# EAGLE board lcd2 (EAGLE 4.09)
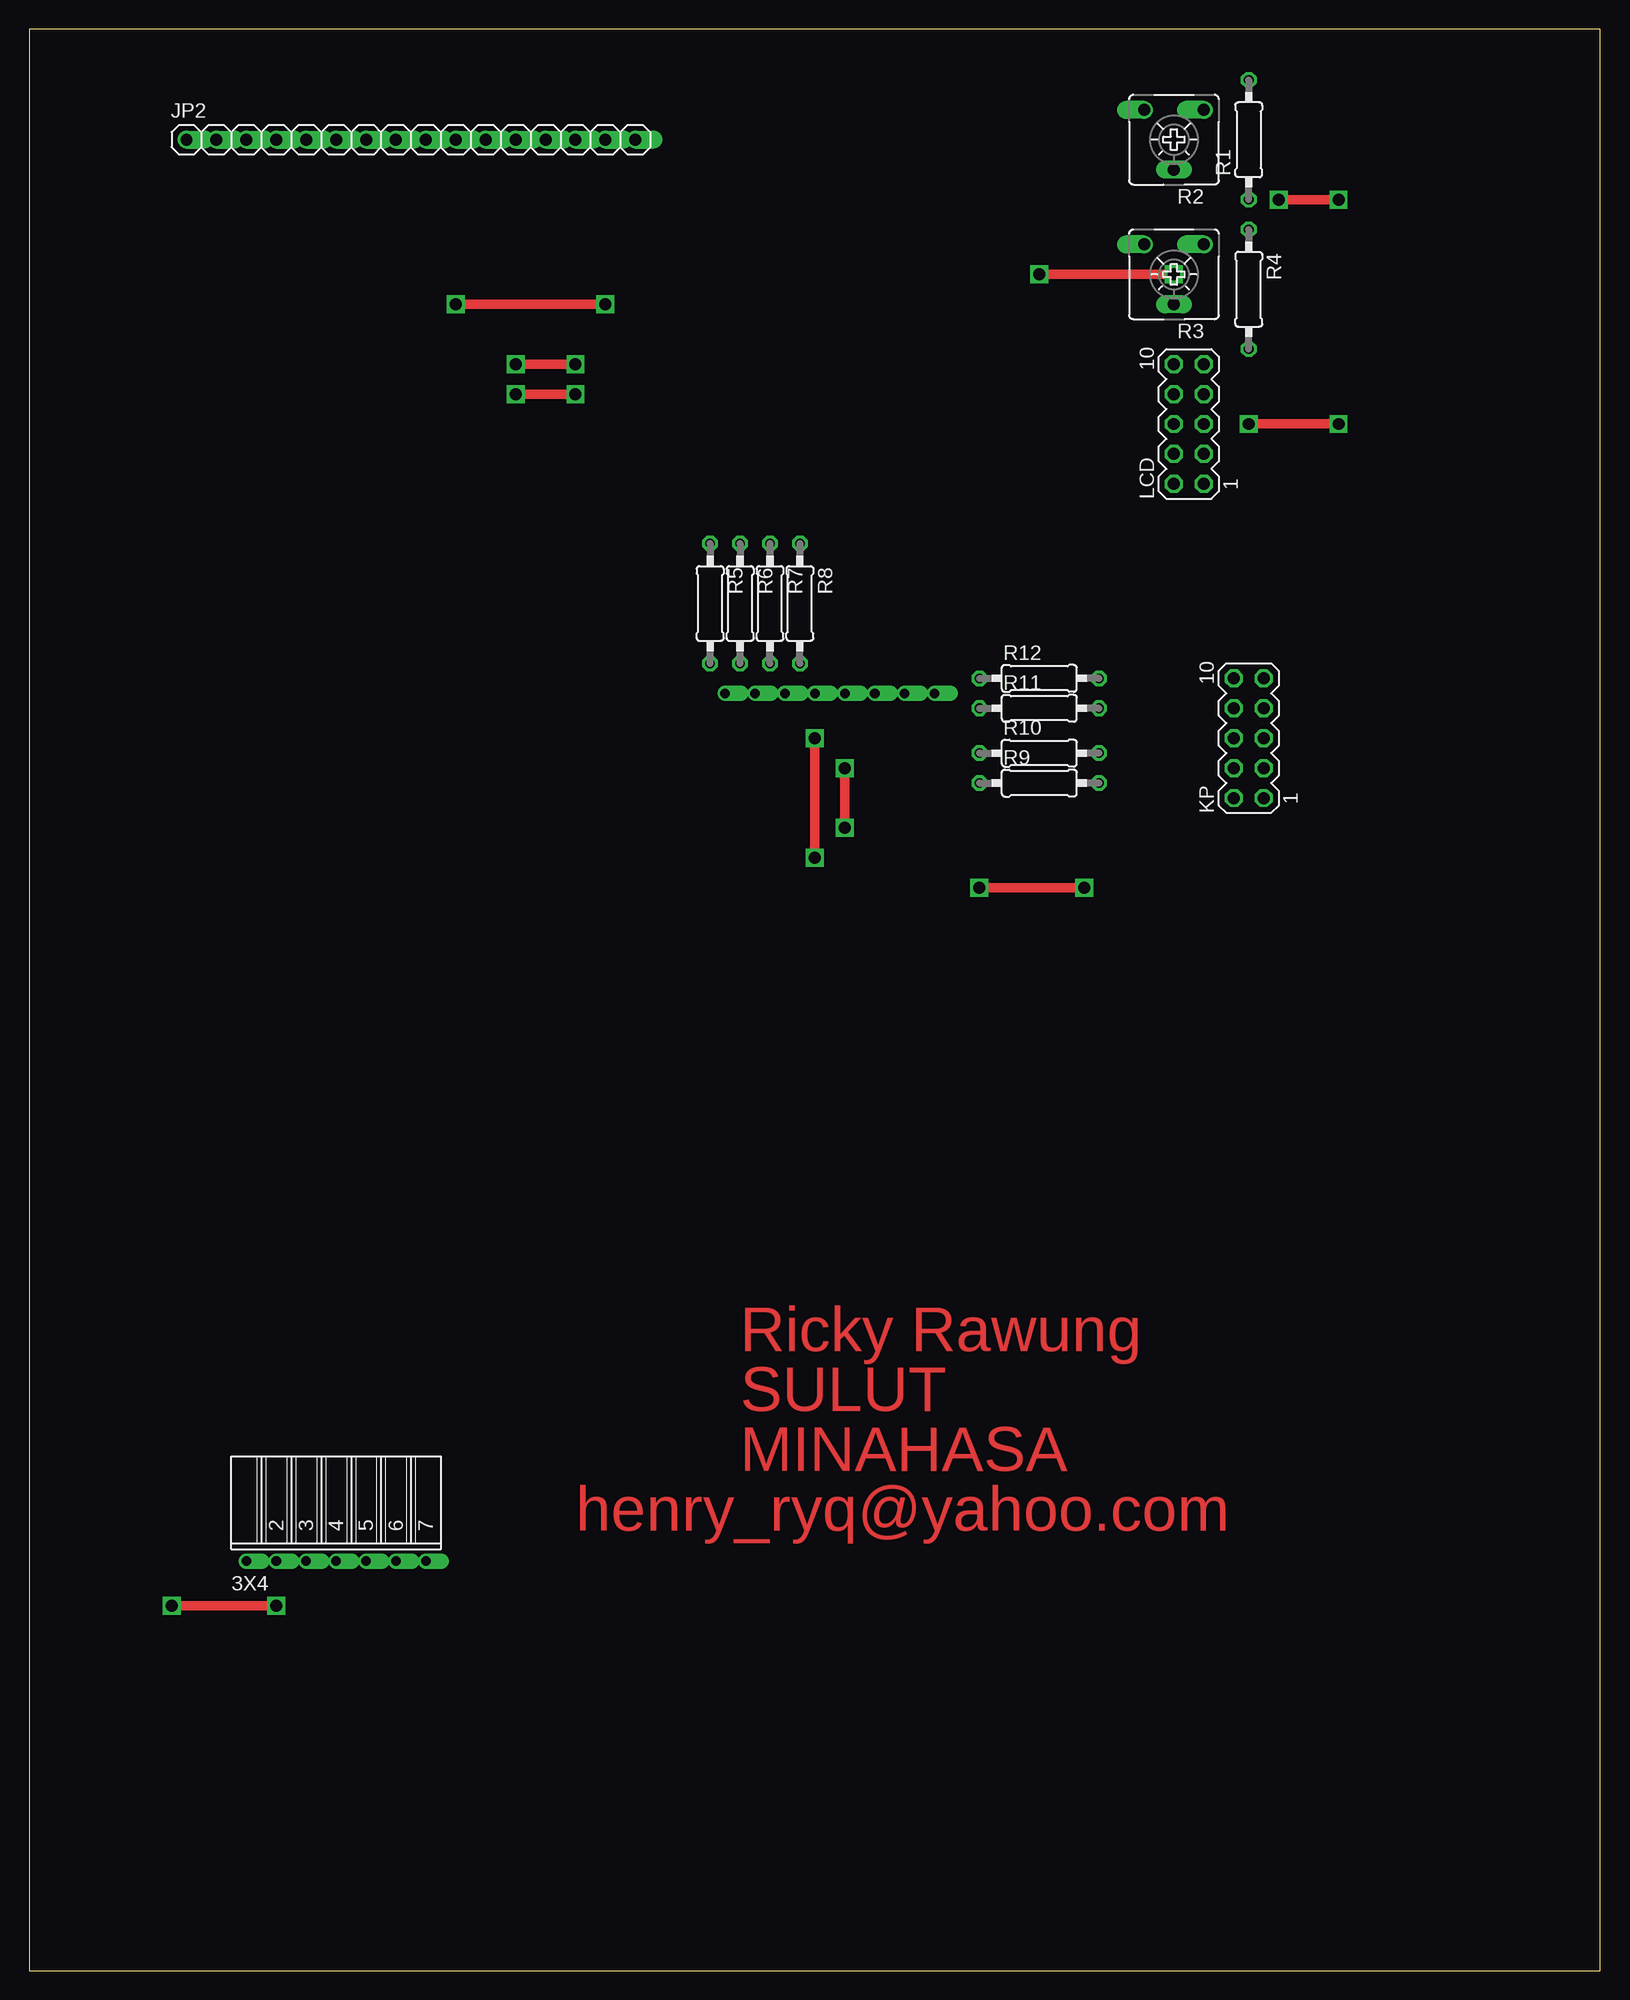
[diagram p0: board, top side]
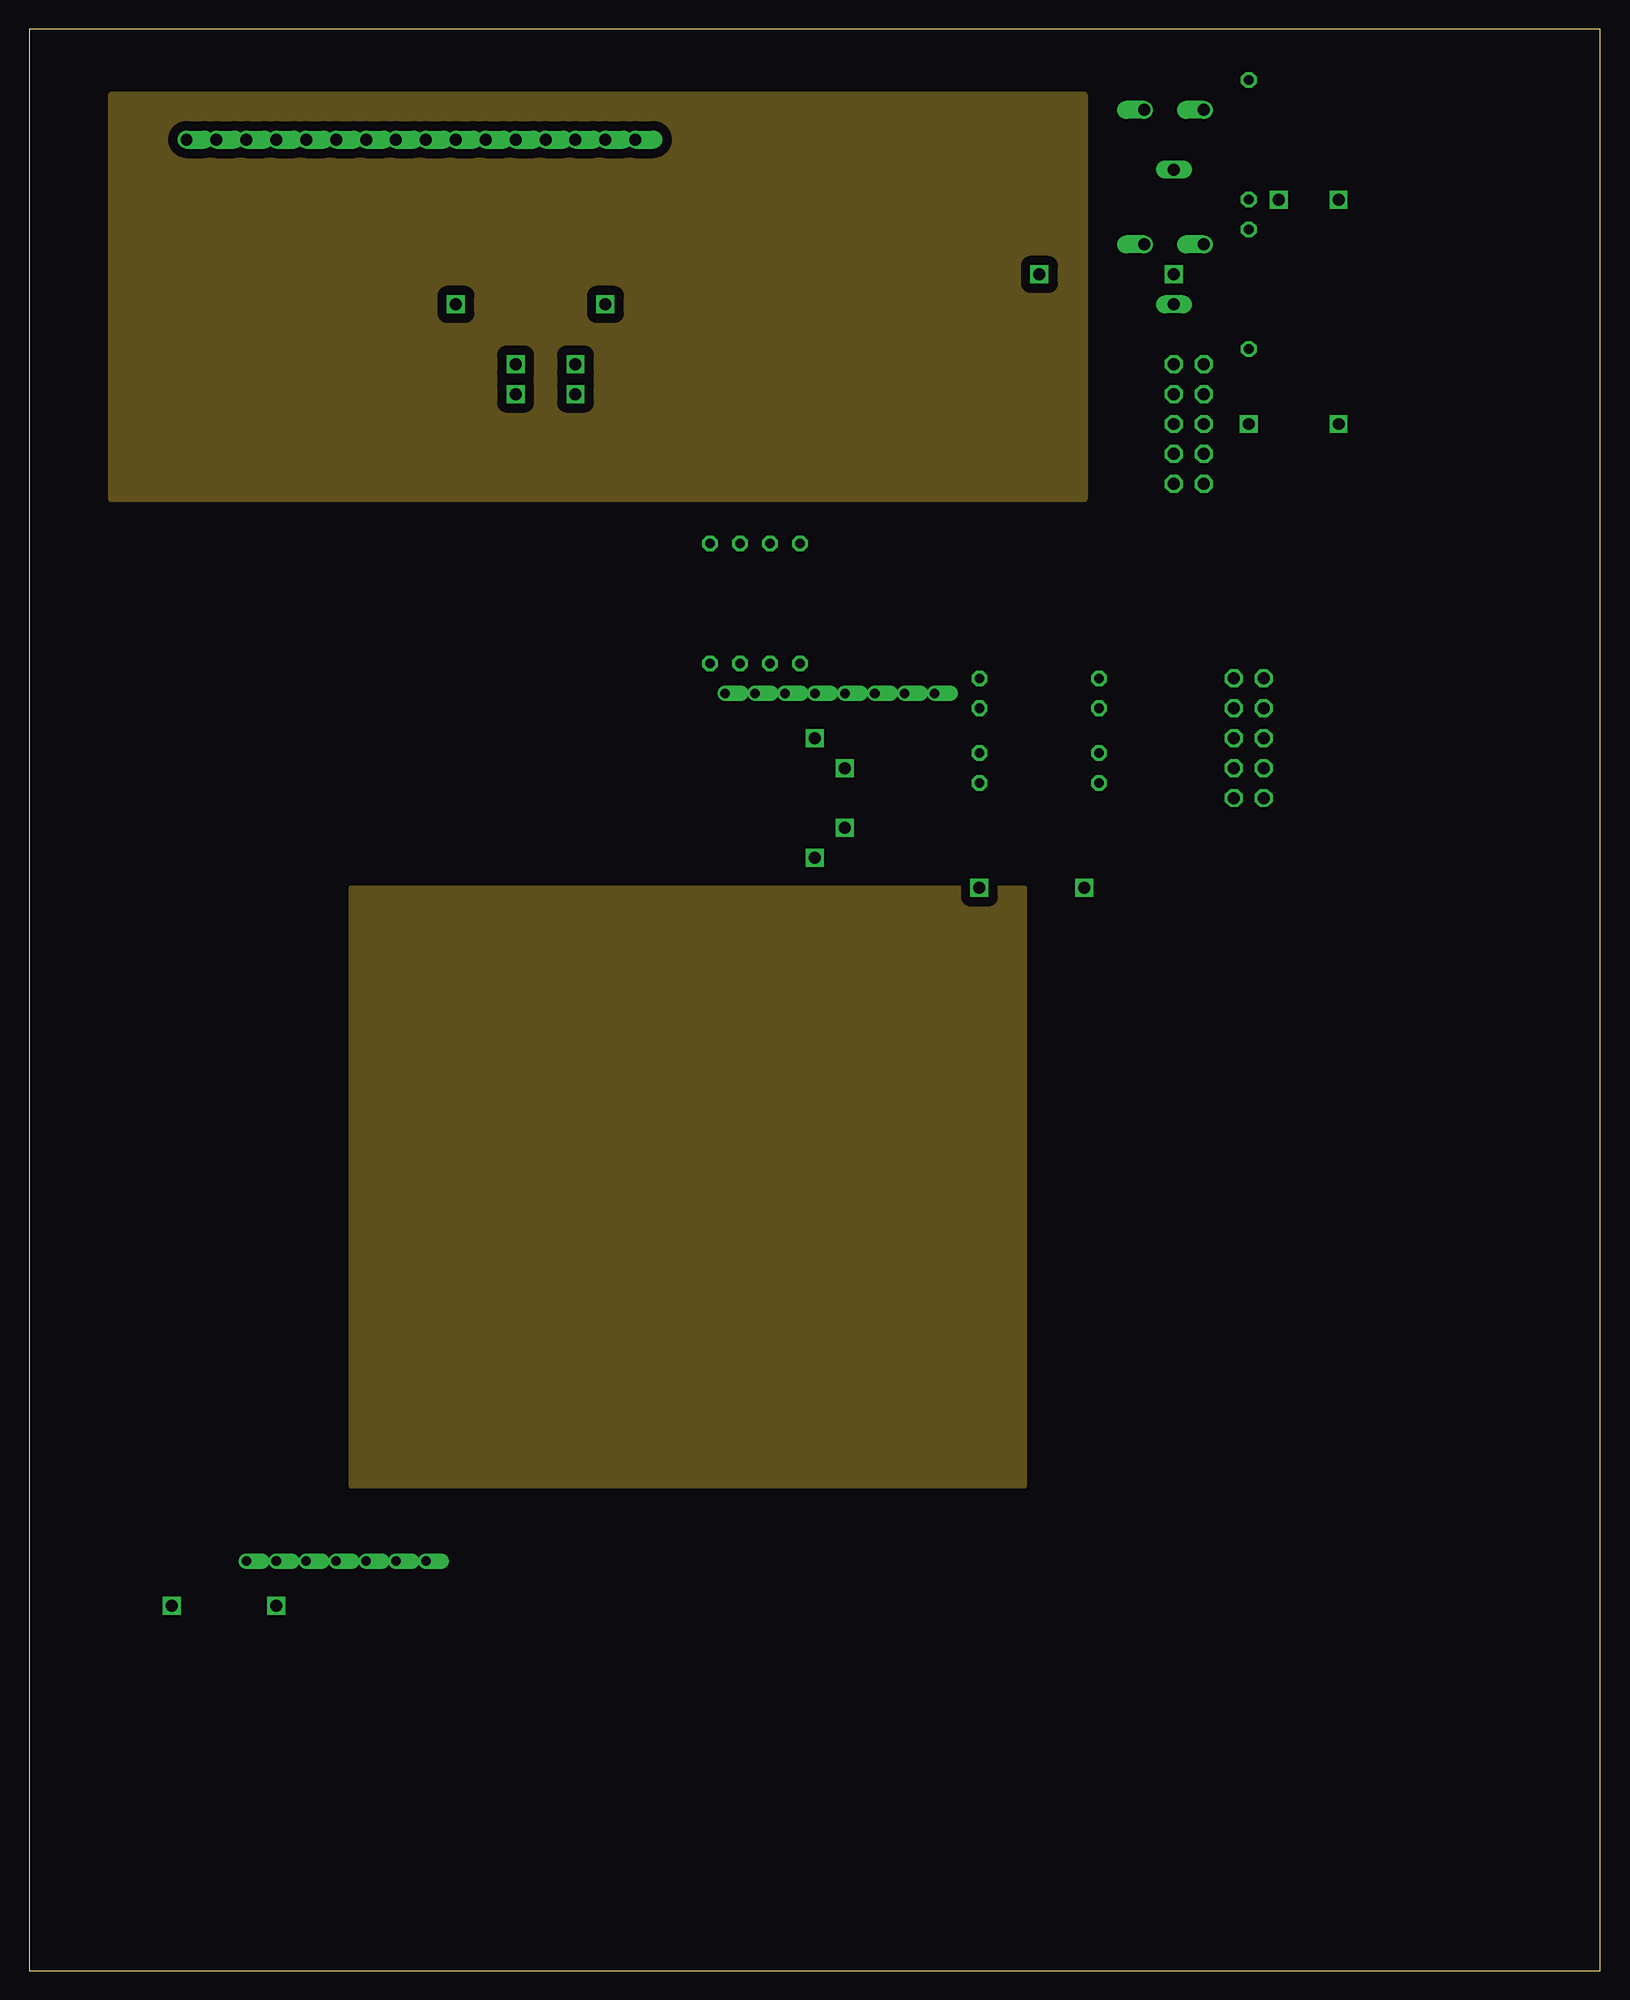
[diagram p1: board, inner layer Route15]
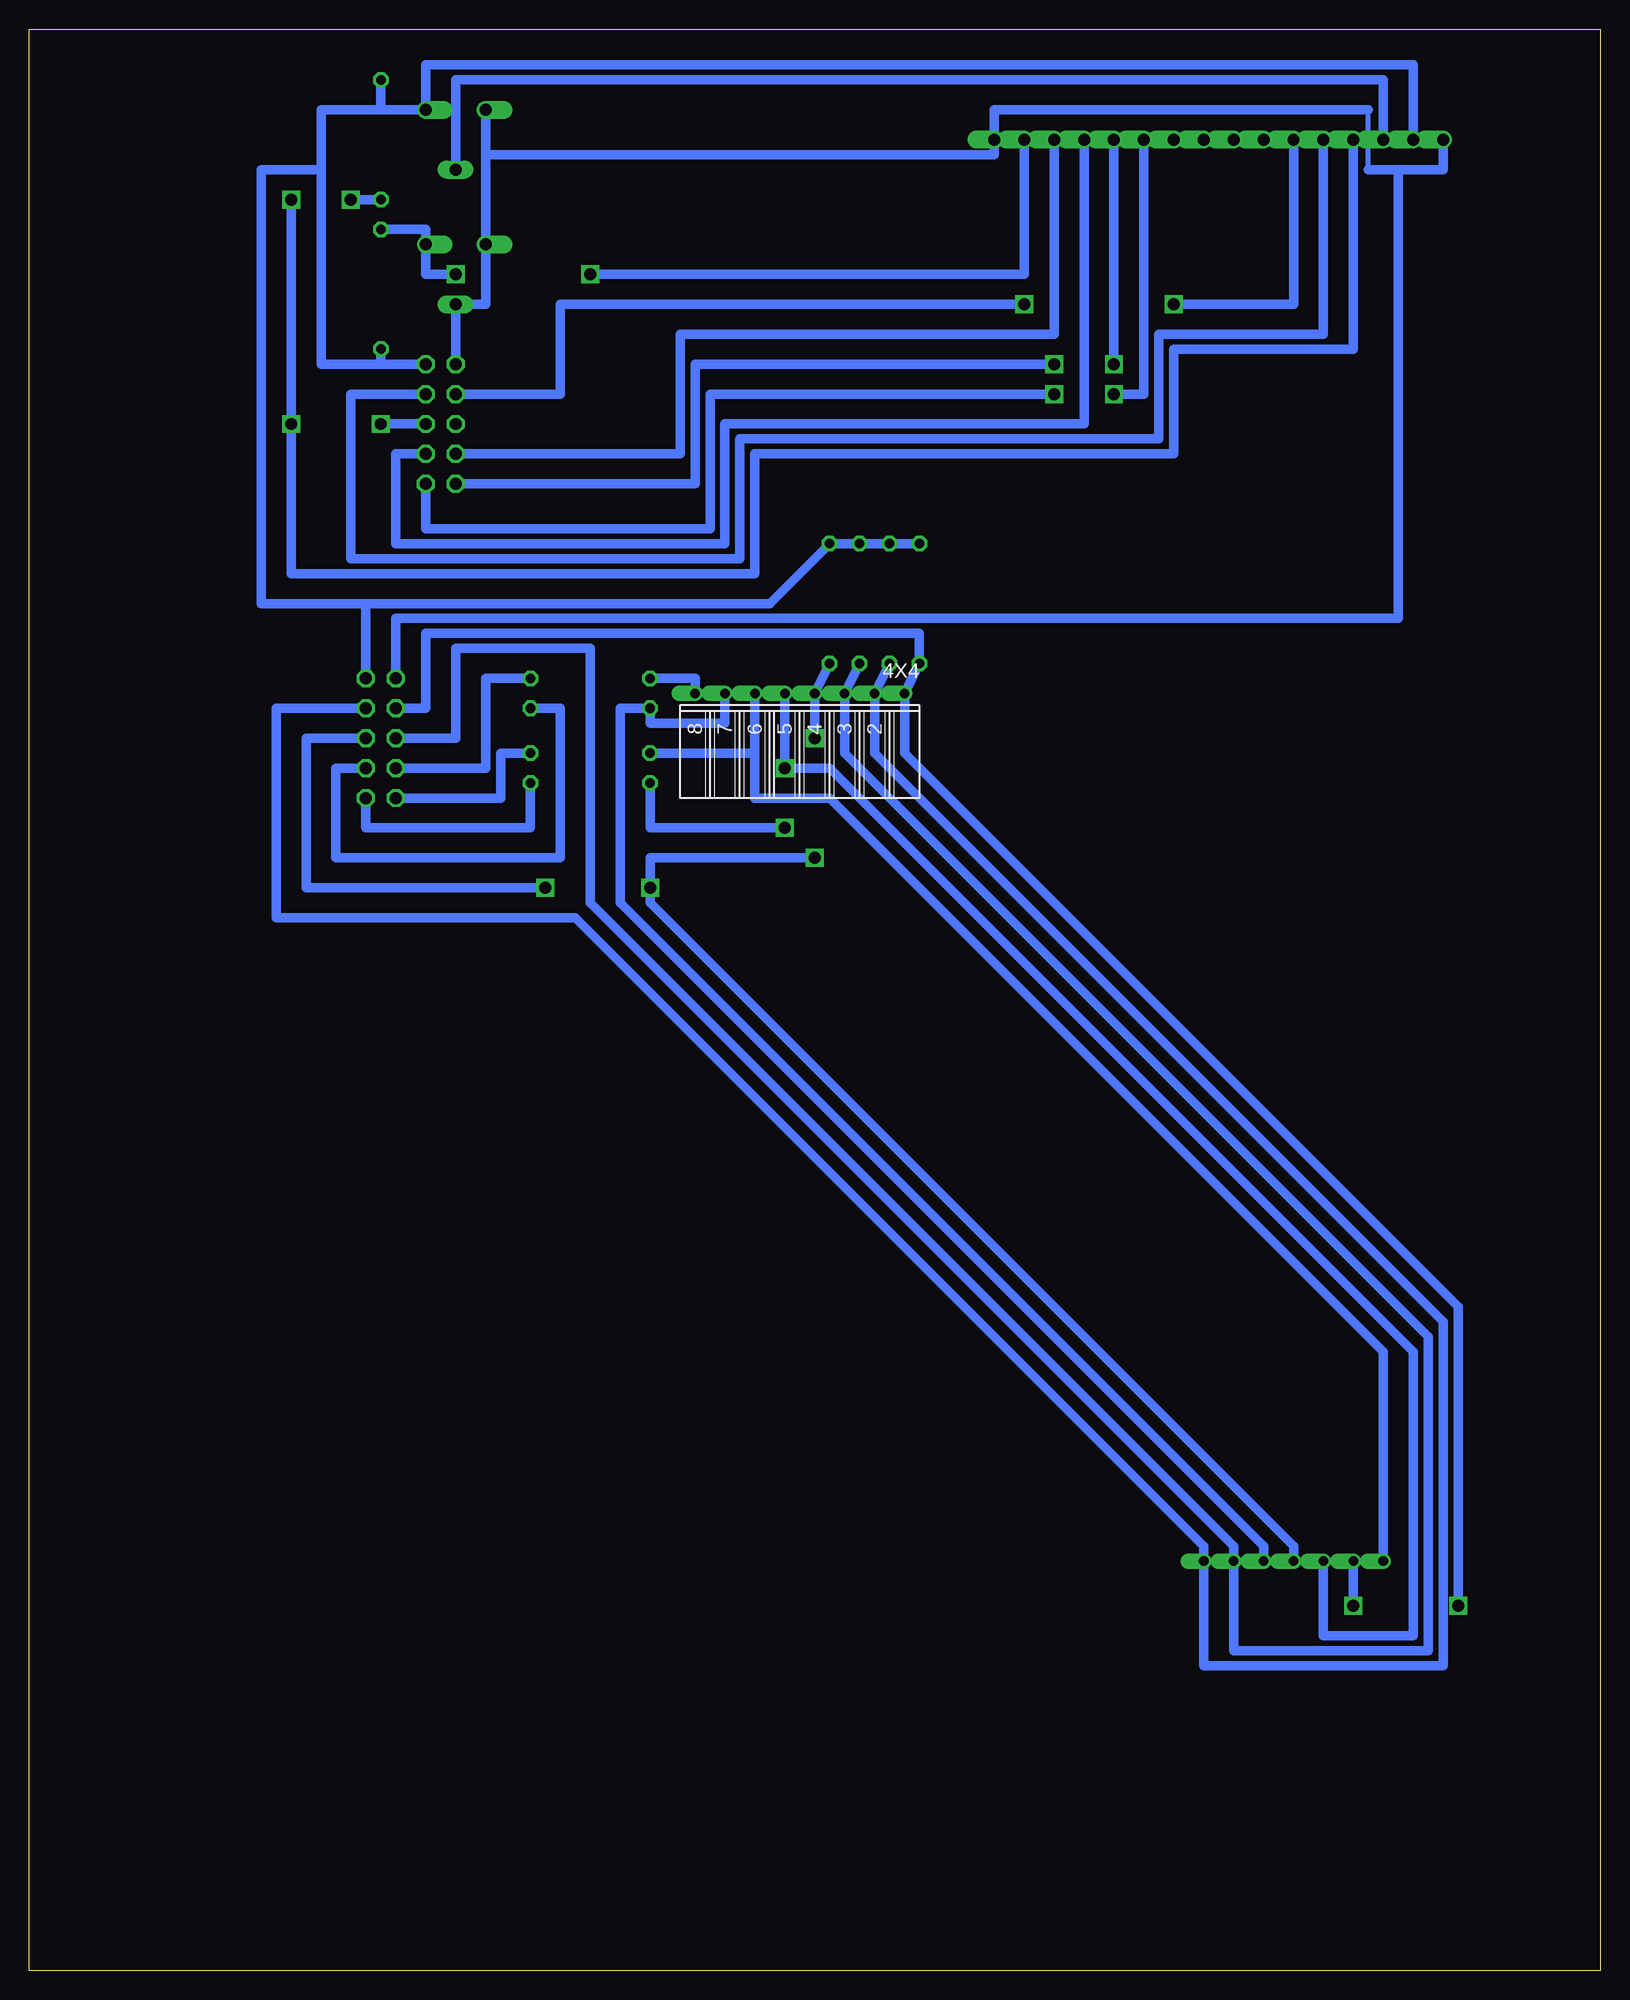
[diagram p2: board, bottom side, seen from below]

Size 133.33 x 164.77 mm. Coordinates in mm from the lower left corner, seen from the top.
Outline: 0,0 133.33,0 133.33,164.77 0,164.77 0,0
Copper layers used: Top, Route15, Bottom
Net classes: 0 default: width 0.813 mm, drill 0.813 mm, clearance 0.813 mm

## Footprints (pad centres in the part's own frame; a part is rotated, then mirrored left to right if it is on the bottom)
FE07W = drill 0.813 offset: 1 -7.62,0; 2 -5.08,0; 3 -2.54,0; 4 0,0; 5 2.54,0; 6 5.08,0; 7 7.62,0
FE08W = drill 0.813 offset: 1 -8.89,0; 2 -6.35,0; 3 -3.81,0; 4 -1.27,0; 5 1.27,0; 6 3.81,0; 7 6.35,0; 8 8.89,0
1X16 = drill 1.016 offset: 1 -19.05,0; 2 -16.51,0; 3 -13.97,0; 4 -11.43,0; 5 -8.89,0; 6 -6.35,0; 7 -3.81,0; 8 -1.27,0; 9 1.27,0; 10 3.81,0; 11 6.35,0; 12 8.89,0; 13 11.43,0; 14 13.97,0; 15 16.51,0; 16 19.05,0
MA05-2 = drill 1.016 octagon: 1 -5.08,-1.27; 2 -5.08,1.27; 3 -2.54,-1.27; 4 -2.54,1.27; 5 0,-1.27; 6 0,1.27; 7 2.54,-1.27; 8 2.54,1.27; 9 5.08,-1.27; 10 5.08,1.27
0207/10 = drill 0.813 octagon: 1 -5.08,0; 2 5.08,0
CA6V = drill 1.016 offset: A -2.54,-2.54; E 2.54,-2.54 | drill 1.016 long: S 0,2.54

## Placement (x,y rotation side)
3X4  [FE07W]  26.03,34.76 0 top
4X4  [FE08W]  67.94,108.42 180 bottom
JP2  [1X16]  32.38,155.41 0 top
KP  [MA05-2]  103.5,104.61 90 top
LCD  [MA05-2]  98.42,131.28 90 top
R1  [0207/10]  103.5,155.41 90 top
R2  TRIM_EU-CA6V  [CA6V]  97.15,155.41 180 top
R3  TRIM_EU-CA6V  [CA6V]  97.15,143.98 180 top
R4  [0207/10]  103.5,142.71 270 top
R5  100k  [0207/10]  57.78,116.04 270 top
R6  100k  [0207/10]  60.32,116.04 270 top
R7  100k  [0207/10]  62.86,116.04 270 top
R8  100k  [0207/10]  65.4,116.04 270 top
R9  10k  [0207/10]  85.72,100.8 0 top
R10  10k  [0207/10]  85.72,103.34 0 top
R11  10k  [0207/10]  85.72,107.15 0 top
R12  10k  [0207/10]  85.72,109.69 0 top

## Library data of the parts
3X4 4X4 = con-lsta
JP2 = pinhead
KP LCD = con-lstb
R1 R4-R12 = rcl
R2 R3 = pot

## Nets
B1: 3X4.2 4X4.1 KP.8 R5.2
B2: 3X4.7 4X4.2 KP.7 R6.2
B3: 3X4.6 4X4.3 KP.6 R7.2
B4: 3X4.4 4X4.4 KP.5 R8.2
GND: JP2.1 JP2.16 KP.10 LCD.10 R2.E R3.E R3.S
K1: 3X4.3 4X4.5 R9.1
K2: 3X4.1 4X4.6 R10.1
K3: 3X4.5 4X4.7 R11.1
K4: 4X4.8 R12.1
KK1: KP.1 R9.2
KK2: KP.2 R10.2
KK3: KP.3 R11.2
KK4: KP.4 R12.2
LED: JP2.15 R3.A R4.1
N$7: JP2.7
N$8: JP2.8
N$9: JP2.9
N$10: JP2.10
P0: JP2.11 LCD.1
P1: JP2.12 LCD.2
P2: JP2.13 LCD.3
P3: JP2.14 LCD.4
P4: JP2.4 LCD.5 R1.1
P5: LCD.6
P6: JP2.5 LCD.7
P7: JP2.6 LCD.8
RPOT: JP2.3 R2.S
VCC: JP2.2 KP.9 LCD.9 R1.2 R2.A R4.2 R5.1 R6.1 R7.1 R8.1

## Tracks (layer width: path | path; a pad name or v marks a point on that pad's centre or on a via)
B1  (via drill 1.02)
  Top 0.813: v12.06,30.95 v20.95,30.95
  Bottom 0.813: KP.8 99.69,107.15 99.69,113.5 57.78,113.5 R5.2 4X4.1 59.05,103.34 12.06,56.35 v12.06,30.95 | v20.95,30.95 3X4.2
B2
  Bottom 0.813: R6.2 4X4.2 61.59,103.34 13.33,55.08 13.33,25.87 33.65,25.87 3X4.7 33.65,36.03 86.99,89.37 112.39,89.37 112.39,107.15 KP.7
B3
  Bottom 0.813: R7.2 4X4.3 64.13,103.34 14.6,53.81 14.6,27.14 31.11,27.14 3X4.6 31.11,36.03 85.72,90.64 85.72,112.23 97.15,112.23 97.15,104.61 KP.6
B4  (via drill 1.02)
  Top 0.813: v66.67,94.45 v66.67,104.61 | v80.64,91.91 v89.53,91.91
  Bottom 0.813: R8.2 4X4.4 v66.67,104.61 | 80.64,94.45 v66.67,94.45 | 80.64,94.45 v80.64,91.91 | 80.64,94.45 80.64,90.64 26.03,36.03 3X4.4 | KP.5 109.85,104.61 109.85,91.91 v89.53,91.91
GND
  Bottom 0.406: 19.68,152.87 19.68,157.95
  Bottom 0.813: LCD.10 R3.S 94.61,141.44 R3.E 94.61,154.14 | 94.61,154.14 R2.E | 94.61,154.14 51.43,154.14 JP2.16 51.43,157.95 19.68,157.95 | 17.14,152.87 13.33,152.87 JP2.1 | 17.14,152.87 19.68,152.87 | 17.14,152.87 17.14,114.77 102.23,114.77 KP.10
K1  (via drill 1.02)
  Top 0.813: v69.21,96.99 v69.21,102.07
  Bottom 0.813: 3X4.3 23.49,28.41 15.87,28.41 15.87,52.54 65.4,102.07 v69.21,102.07 4X4.5 | v69.21,96.99 80.64,96.99 R9.1
K2
  Bottom 0.813: 71.75,99.53 65.4,99.53 18.41,52.54 3X4.1 | 71.75,99.53 4X4.6 | 71.75,99.53 71.75,103.34 R10.1
K3
  Bottom 0.813: 3X4.5 28.57,36.03 83.18,90.64 83.18,107.15 R11.1 80.64,105.88 74.29,105.88 4X4.7
K4
  Bottom 0.813: R12.1 76.83,109.69 4X4.8
KK1
  Bottom 0.813: R9.2 90.8,96.99 104.77,96.99 KP.1
KK2
  Bottom 0.813: R10.2 93.34,103.34 93.34,99.53 KP.2
KK3
  Bottom 0.813: R11.2 88.26,107.15 88.26,94.45 107.31,94.45 107.31,102.07 KP.3
KK4
  Bottom 0.813: R12.2 94.61,109.69 94.61,102.07 KP.4
LED  (via drill 1.02)
  Top 0.813: v85.72,143.98 v97.15,143.98
  Bottom 0.813: 99.69,147.79 R4.1 | 99.69,147.79 R3.A | 99.69,147.79 99.69,143.98 v97.15,143.98 | v85.72,143.98 48.89,143.98 JP2.15
N$1
  pour Route15: 89.53,124.93 6.98,124.93 6.98,159.22 89.53,159.22
N$2
  pour Route15: 27.3,91.91 84.45,91.91 84.45,41.11 27.3,41.11
P0  (via drill 1.02)
  Top 0.813: v41.27,133.82 v46.35,133.82
  Bottom 0.813: LCD.1 99.69,122.39 75.56,122.39 75.56,133.82 v46.35,133.82 | v41.27,133.82 38.73,133.82 JP2.11
P1  (via drill 1.02)
  Top 0.813: v41.27,136.36 v46.35,136.36
  Bottom 0.813: v46.35,136.36 76.83,136.36 76.83,126.2 LCD.2 | v41.27,136.36 JP2.12
P2
  Bottom 0.813: LCD.3 102.23,128.74 102.23,121.12 74.29,121.12 74.29,131.28 43.81,131.28 JP2.13
P3
  Bottom 0.813: LCD.4 78.1,128.74 78.1,138.9 46.35,138.9 JP2.14
P4  (via drill 1.02)
  Top 0.813: v111.12,131.28 v103.5,131.28 | v111.12,150.33 v106.04,150.33
  Bottom 0.813: v103.5,131.28 LCD.5 | v111.12,150.33 v111.12,131.28 111.12,118.58 71.75,118.58 71.75,128.74 36.19,128.74 36.19,137.63 20.95,137.63 JP2.4 | v106.04,150.33 R1.1
P6
  Bottom 0.813: LCD.7 106.04,133.82 106.04,119.85 73.02,119.85 73.02,130.01 37.46,130.01 37.46,138.9 23.49,138.9 JP2.5
P7  (via drill 1.02)
  Top 0.813: v36.19,141.44 v48.89,141.44
  Bottom 0.813: v48.89,141.44 88.26,141.44 88.26,133.82 LCD.8 | v36.19,141.44 26.03,141.44 JP2.6
RPOT
  Bottom 0.813: R2.S 97.15,160.49 18.41,160.49 JP2.3
VCC
  Bottom 0.813: 103.5,136.36 LCD.9 | 103.5,157.95 R1.2 | JP2.2 15.87,161.76 99.69,161.76 R2.A 103.5,157.95 | 103.5,136.36 108.58,136.36 108.58,152.87 | 103.5,136.36 R4.2 | 108.58,152.87 108.58,157.95 103.5,157.95 | 104.77,116.04 113.66,116.04 113.66,152.87 108.58,152.87 | R5.1 R6.1 R7.1 R8.1 70.48,116.04 104.77,116.04 | 104.77,116.04 KP.9

## Text on the board
Top: Ricky Rawung | SULUT | MINAHASA | henry_ryq@yahoo.com